# EAGLE board MySens-GWeasySensRS485-003 (EAGLE 7.6.0)
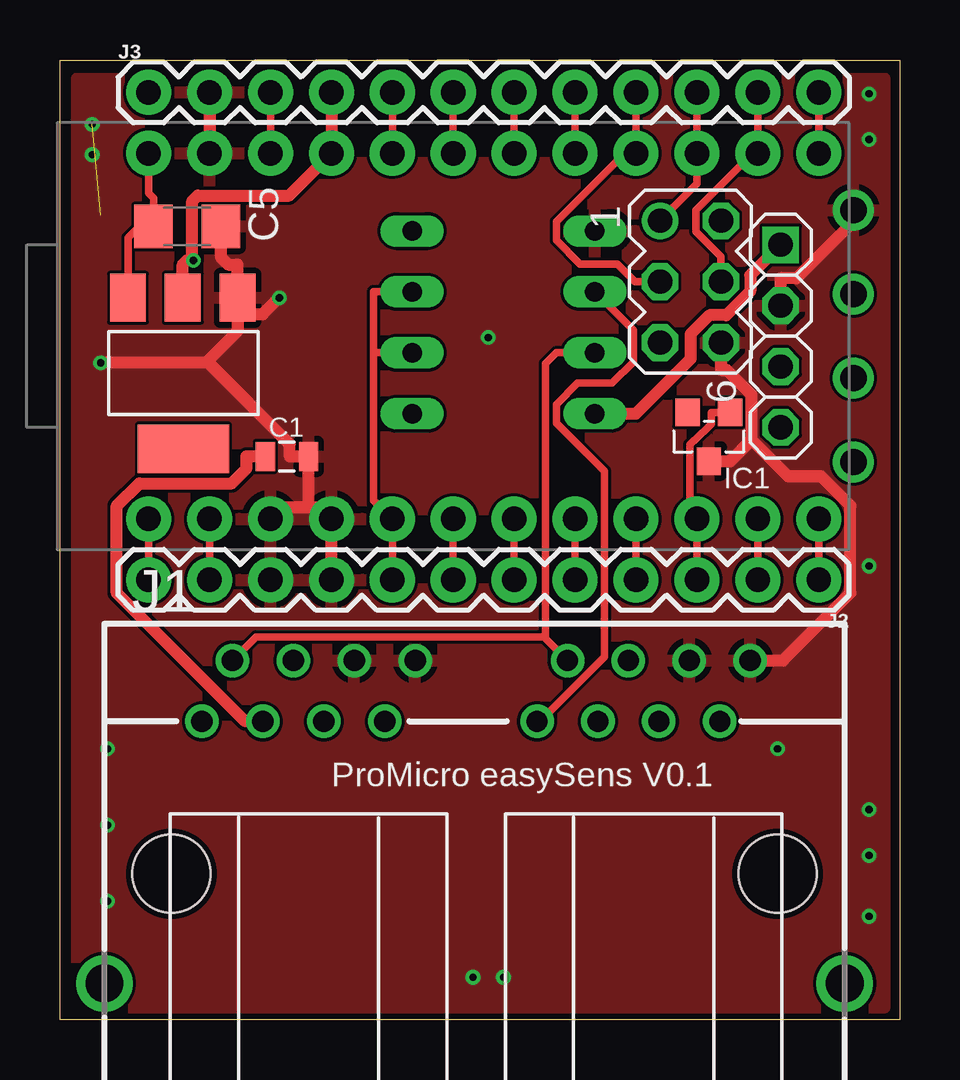
[diagram p0: board, top side]
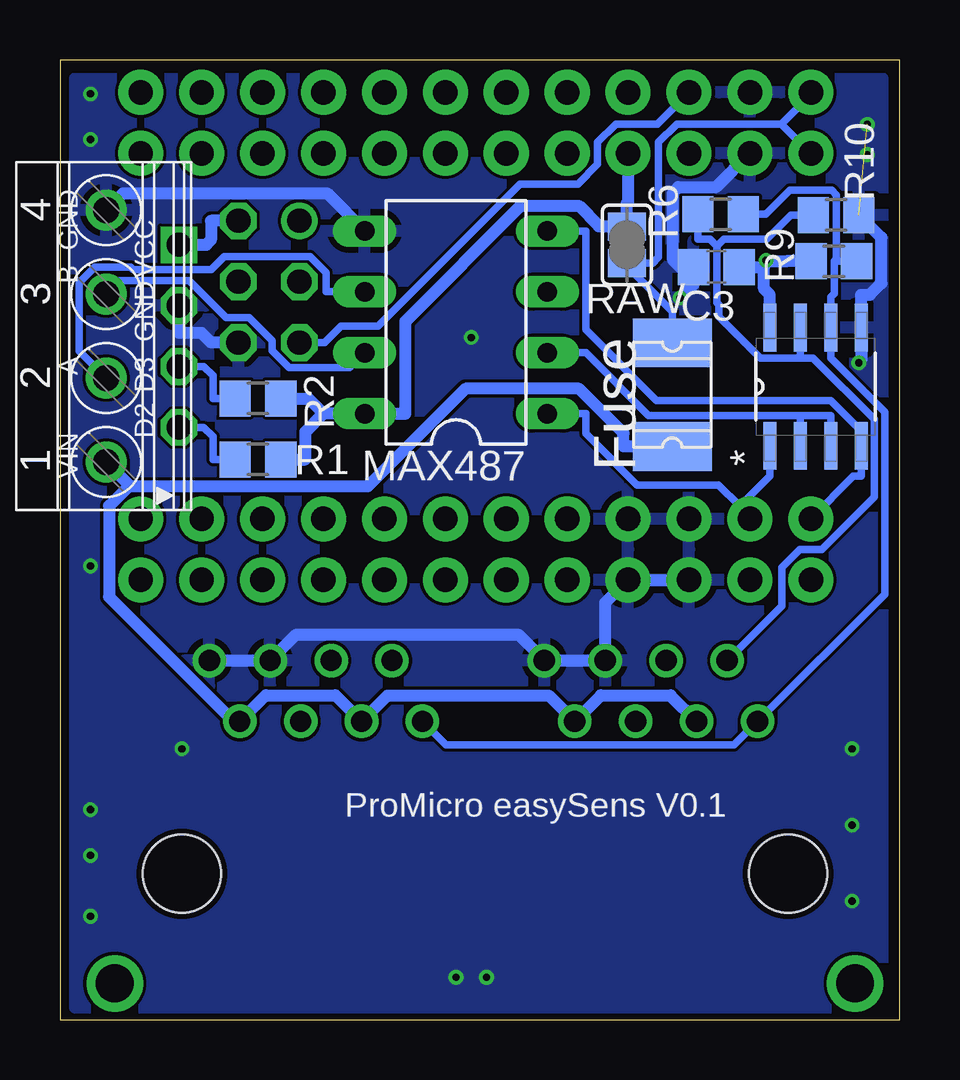
[diagram p1: board, bottom side, seen from below]

Size 35 x 40 mm. Coordinates in mm from the lower left corner, seen from the top.
Outline: 0,0 0,40 35,40 35,0 0,0
Copper layers (1*16): Top 0.035mm / dielectric 1.5mm / Bottom 0.035mm
Design rules "dirt_cheap_dirty_boards.v1": minimum track width 5mil, minimum drill 12mil, track to track 5mil, track to pad 5mil, pad to pad 5mil, via to via 5mil, smd to smd 0mil, copper to edge 10mil, drill to drill 10mil, minimum pad ring 10mil, minimum via ring 6mil, stop-mask expansion 2mil, vias tented up to drill 25mil, thermal gap 10mil
Net classes: 0 default: width 0.305 mm; 1 Power: width 0.508 mm

## Footprints (pad centres in the part's own frame; a part is rotated, then mirrored left to right if it is on the bottom)
SOT223 = smd 1.499 x 2.007: 1 -2.261,-3.15; 2 0.025,-3.15; 3 2.311,-3.15 | smd 3.81 x 2.007: 4 0,3.15
SPARKFUN_PRO_MICRO = drill 1.016 pad 1.88: 1 -7.62,12.7; 2 -7.62,10.16; 3 -7.62,7.62; 4 -7.62,5.08; 5 -7.62,2.54; 6 -7.62,0; 7 -7.62,-2.54; 8 -7.62,-5.08; 9 -7.62,-7.62; 10 -7.62,-10.16; 11 -7.62,-12.7; 12 -7.62,-15.24; 13 7.62,-15.24; 14 7.62,-12.7; 15 7.62,-10.16; 16 7.62,-7.62; 17 7.62,-5.08; 18 7.62,-2.54; 19 7.62,0; 20 7.62,2.54; 21 7.62,5.08; 22 7.62,7.62; 23 7.62,10.16; 24 7.62,12.7
0805 = smd 0.8 x 1.2: 1 -0.9,0; 2 0.9,0
C0805 = smd 1.3 x 1.5: 1 -0.95,0; 2 0.95,0
C1206 = smd 1.6 x 1.8: 1 -1.4,0; 2 1.4,0
1812L = smd 2.03 x 3.3: P$1 -2.16,0; P$2 2.16,0
SOT23 = smd 1.016 x 1.143: 1 -0.889,-1.016; 2 0.889,-1.016; 3 0,1.016
557570-1 = drill 0.889: 1-1 -11.43,6.35; 1-2 -10.16,8.89; 1-3 -8.89,6.35; 1-4 -7.62,8.89; 1-5 -6.35,6.35; 1-6 -5.08,8.89; 1-7 -3.81,6.35; 1-8 -2.54,8.89; 2-1 2.54,6.35; 2-2 3.81,8.89; 2-3 5.08,6.35; 2-4 6.35,8.89; 2-5 7.62,6.35; 2-6 8.89,8.89; 2-7 10.16,6.35; 2-8 11.43,8.89 | drill 1.575 pad 2.184: G1 -15.494,-4.572; G3 15.367,-4.572 | hole 3.251: -12.7,0; 12.573,0
1X12 = drill 1.016 pad 1.88: 1 0,0; 2 2.54,0; 3 5.08,0; 4 7.62,0; 5 10.16,0; 6 12.7,0; 7 15.24,0; 8 17.78,0; 9 20.32,0; 10 22.86,0; 11 25.4,0; 12 27.94,0
1X04-S = drill 1.016 square: 1 -3.81,0 | drill 1.016 octagon: 2 -1.27,0; 3 1.27,0; 4 3.81,0
DIL08 = drill 0.813 long: 1 -3.81,-3.81; 2 -1.27,-3.81; 3 1.27,-3.81; 4 3.81,-3.81; 5 3.81,3.81; 6 1.27,3.81; 7 -1.27,3.81; 8 -3.81,3.81
R0805 = smd 1.3 x 1.5: 1 -0.95,0; 2 0.95,0
SJ = smd 1.168 x 1.6: 1 -0.762,0; 2 0.762,0
SOIC127P600X175-8N = smd 1.981 x 0.533: 1 -2.464,1.905; 2 -2.464,0.635; 3 -2.464,-0.635; 4 -2.464,-1.905; 5 2.464,-1.905; 6 2.464,-0.635; 7 2.464,0.635; 8 2.464,1.905
MA03-2 = drill 1.016: 1 -2.54,-1.27 | drill 1.016 octagon: 2 -2.54,1.27; 3 0,-1.27; 4 0,1.27; 5 2.54,-1.27; 6 2.54,1.27
1751264 = drill 1.1 pad 1.7: 1 -5.25,-0.1; 2 -1.75,-0.1; 3 1.75,-0.1; 4 5.25,-0.1

## Placement (x,y rotation side)
1117  REG1117  [SOT223]  5.14,26.94 180 top
B1  SPARKFUN_PRO_MICRO  [SPARKFUN_PRO_MICRO]  16.39,28.49 90 top
C1  10uF  [0805]  9.46,23.48 0 top
C3  22p  [C0805]  7.63,31.37 0 bottom
C5  0.1uF  [C1206]  5.3,33.06 0 top
F1  1812L  [1812L]  9.47,26.05 90 bottom
IC1  ATSHA204A  [SOT23]  27.05,24.3 180 top
J1  [557570-1]  17.35,6.08 0 top
J2  [1X12]  31.64,18.33 180 top
J3  [1X12]  3.69,38.65 0 top
JP10  [1X04-S]  30.05,28.49 270 top
MAX487  MAX481CPA  [DIL08]  18.49,29.07 90 bottom
R1  10K  [R0805]  26.75,23.35 180 bottom
R2  10K  [R0805]  26.75,25.89 180 bottom
R6  150R  [R0805]  7.46,33.57 180 bottom
R9  330R  [R0805]  2.74,31.61 0 bottom
R10  330R  [R0805]  2.65,33.54 0 bottom
RAW  [SJ]  11.37,32.3 270 bottom
RS1  MAX487ECSA+  [SOIC127P600X175-8N]  3.5,26.38 90 bottom
SV1  [MA03-2]  26.29,30.76 270 top
X7  1751264  [1751264]  33.17,28.49 90 bottom

## Library data of the parts
1117 = burr-brown; MPN: REG1117; OC_FARNELL: 1097566; OC_NEWARK: 14P6981
B1 = SparkFun-Boards
C1 = SparkFun-Passives
C3 C5 R1 R2 R6 R9 R10 = rcl
F1 = ptc-littlefuse
IC1 = Sensor
J1 = con-amp
J2 J3 = SparkFun-Connectors
JP10 = pinhead-2
MAX487 = maxim-4
RAW = jumper
RS1 = Maxim_By_element14_Batch_1; MPN: MAX487ECSA+; OC_FARNELL: 9724532; OC_NEWARK: 68K4803; PACKAGE: SOIC-8; SUPPLIER: Maxim
SV1 = con-lstb; OC_FARNELL: unknown; OC_NEWARK: unknown
X7 = con-phoenix-350; MPN: 1751264; OC_FARNELL: unknown; OC_NEWARK: 10R0934

## Nets
3: B1.6 J2.7
3V3: IC1.2
4: B1.7 J2.6
5: B1.8 J2.5
6: B1.9 J2.4
7: B1.10 IC1.1 J2.3
8: B1.11 J2.2
9: B1.12 J2.1
10: B1.13 J3.12
A: J1.1-1 J1.2-1 MAX487.6 R6.1 R9.2 RS1.6 X7.2
A0: B1.17 J3.8
A1: B1.18 J3.7
A2: B1.19 J3.6
A3: B1.20 J3.5
B: J1.1-2 J1.2-2 MAX487.7 R6.2 R10.1 RS1.7 X7.3
D2: JP10.4 R1.2
D3: JP10.3 R2.2
GND [Power]: 1117.1 B1.3 B1.4 B1.23 C1.2 C3.1 C5.2 IC1.3 J1.1-6 J1.1-8 J1.2-6 J1.2-8 J2.9 J2.10 J3.2 JP10.2 MAX487.5 R10.2 RS1.5 SV1.6 X7.4
IN [Power]: C1.1 F1.P$1 J1.1-3 J1.1-7 J1.2-3 J1.2-7 X7.1
IRQ: B1.5 J2.8 MAX487.2 MAX487.3 RS1.2 RS1.3
MISO: B1.15 J3.10 SV1.1
MOSI: B1.14 J3.11 SV1.4
N$1: J1.2-4
N$5: J1.2-5
N$9: J1.1-4
N$10: J1.1-5
RAW: 1117.3 B1.24 C5.1 F1.P$2 J3.1 RAW.2
RST: B1.22 J3.3 SV1.5
RX: B1.2 J2.11 MAX487.1 RS1.1
SCK: B1.16 J3.9 SV1.3
TX: B1.1 J2.12 MAX487.4 RS1.4
VCC [Power]: 1117.2 B1.21 C3.2 J3.4 JP10.1 MAX487.8 R1.1 R2.1 R9.1 RAW.1 RS1.8 SV1.2

## Tracks (layer width: path | path; a pad name or v marks a point on that pad's centre or on a via)
3
  Top 0.305: J2.7 B1.6
4
  Top 0.305: J2.6 B1.7
5
  Top 0.305: J2.5 B1.8
6
  Top 0.305: J2.4 B1.9
7
  Top 0.305: J2.3 B1.10 26.26,21.17 26.26,23.96 26.43,24.13 26.46,24.13 27.15,24.82 27.15,25.31 IC1.1
8
  Top 0.305: J2.2 B1.11
9
  Top 0.305: J2.1 B1.12
10
  Top 0.305: J3.12 B1.13
A
  Top 0.305: MAX487.6 23.91,28.73 23.91,27.41 23.02,26.52 21.58,26.52 20.7,25.64 20.7,24.87 22.69,22.87 22.69,15.12 20,12.43 J1.2-1
  Bottom 0.305: MAX487.6 23.9,30.34 23.9,31.13 24.58,31.8 28.16,31.8 28.71,31.26 31.94,31.26 32.05,31.37 33.55,31.37 34.21,30.71 34.21,27.87 X7.2 | J1.2-1 18.91,11.45 6.9,11.45 J1.1-1 0.62,17.73 0.62,25.32 2.87,27.57 2.87,28.32 RS1.6 2.87,30.11 2.72,30.26 2.72,31.61 2.63,31.61 | R6.1 5.58,33.57 4.58,34.57 2.83,34.57 2.63,34.37 2.63,31.61 | 2.63,31.61 2.57,31.61 R9.2
A0
  Top 0.305: J3.8 B1.17
A1
  Top 0.305: J3.7 B1.18
A2
  Top 0.305: J3.6 B1.19
A3
  Top 0.305: J3.5 B1.20
B
  Top 0.305: 20.25,15.95 20.25,15.88 J1.2-2 | 20.25,15.95 20.25,27.34 20.7,27.8 MAX487.7 | J1.1-2 8.17,15.95 20.25,15.95
  Bottom 0.305: 7.61,32.24 7.91,32.54 8.41,32.54 R6.2 | 4.14,27.57 5.8,27.57 7.54,29.31 7.54,29.8 7.61,29.88 7.61,32.24 | 7.61,32.24 7.32,32.54 5.53,32.54 4.53,33.54 R10.1 | 4.14,27.57 4.14,27.68 RS1.7 | J1.1-2 4.91,17.24 4.91,18.84 4.16,19.6 3.24,19.6 1.05,21.79 1.05,25.02 3.6,27.57 4.14,27.57 | X7.3 32.51,30.8 29.61,30.8 28.07,29.26 27.12,29.26 26.16,28.3 26.16,27.88 25.45,27.17 22.92,27.17 MAX487.7
D2
  Bottom 0.305: R1.2 28.62,23.35 28.62,24.3 29,24.68 JP10.4
D3
  Bottom 0.305: R2.2 28.62,25.89 28.62,26.84 29,27.22 JP10.3
GND  (via drill 0.3 pad 0.61)  (1 unrouted)
  Top 0.508: 10.36,21.35 9.25,21.35 B1.3 | 10.36,21.35 10.84,21.35 B1.4 J2.9 | 10.36,21.35 C1.2 9.58,23.48 9.58,24 6.2,27.38 | 6.2,27.38 v1.7,27.38 | 6.2,27.38 6.2,27.5 7.41,28.7 7.41,29.4 | 7.41,29.4 8.45,29.4 v9.14,30.09 | 7.41,29.4 1117.1 7.41,31.47 7.01,31.47 6.7,31.78 C5.2 | 28.83,24.17 27.94,23.28 IC1.3 | 28.83,24.17 28.83,26.04 27.8,27.08 27.55,27.08 SV1.6 | J1.2-8 30.14,14.97 32.96,17.78 32.96,21.42 31.74,22.64 30.36,22.64 28.83,24.17 | J3.2 B1.23 | JP10.2 30.05,30.9 30.72,30.9 33.08,33.26 X7.4
  Bottom 0.508: v9.14,30.09 8.59,30.64 8.59,30.8 | v1.7,27.38 1.6,27.47 RS1.5 1.6,30.21 1.24,30.21 0.76,30.69 0.76,32.6 R10.2 | X7.4 32.37,34.45 23.87,34.45 MAX487.5 | 8.59,30.8 9.44,31.66 9.44,34.48 9.22,34.7 7.64,34.7 B1.23 | C3.1 8.59,30.8 | J2.10 J2.9 12.27,17.38 J1.1-6 J1.1-8 15.89,16.05 25.16,16.05 J1.2-6 J1.2-8 | JP10.2 30.05,28.62 29.09,28.62 28.7,28.22 SV1.6
  other vias: 1.34,37.32 1.34,36.05 33.73,38.59 33.73,36.69 33.73,18.91 33.73,4.3 33.73,6.84 33.73,8.74 18.49,1.76 17.22,1.76 1.98,4.93 1.98,8.11 1.98,11.29 17.86,28.43 29.92,11.29
  pour Top: 0.71,39.23 34.37,39.23 34.37,0.49 0.71,0.49
  pour Bottom: 0.71,39.23 0.71,0.49 34.37,0.49 34.37,39.23
IN
  Top 0.508: C1.1 7.78,23.48 7.78,22.98 7.16,22.35 3.31,22.35 2.37,21.42 2.37,17.78 7.72,12.43 J1.1-3
  Bottom 0.508: 32.1,22.27 32.96,21.42 32.96,17.62 27.77,12.43 J1.2-7 26.42,13.51 23.51,13.51 J1.2-3 21.35,13.51 14.62,13.51 J1.1-7 12.45,13.51 9.54,13.51 J1.1-3 | 32.1,22.27 X7.1 | 32.1,22.27 32.05,22.22 22.17,22.22 18.09,26.3 13.37,26.3 11.51,24.44 11.51,23.89 F1.P$1
IRQ
  Top 0.305: 13.08,27.8 13.08,21.64 B1.5 J2.8 | 13.08,27.8 13.19,27.8 MAX487.2 | MAX487.3 13.08,30.34 13.08,27.8
  Bottom 0.305: 4.14,25.19 10.47,25.19 13.08,27.8 MAX487.2 | 4.14,25.19 2.87,25.19 RS1.3 | 4.14,25.19 4.14,25.09 RS1.2
MISO
  Top 0.305: J3.10 B1.15 26.55,34.84 SV1.1
MOSI
  Top 0.305: SV1.4 27.55,31.8 26.51,32.84 26.51,33.74 28.88,36.11 B1.14 J3.11
RAW
  Top 0.305: 3.9,33.66 2.83,32.59 1117.3 | 3.9,33.66 3.9,34.24 3.69,34.45 B1.24 | C5.1 3.9,33.66
  Bottom 0.305: F1.P$2 9.47,29.5 11.08,31.11 11.08,31.53 | 11.08,31.53 10.29,31.53 10.04,31.77 10.04,36.57 9.28,37.33 4.92,37.33 | RAW.2 11.08,31.53 | B1.24 4.92,37.33 | 4.92,37.33 3.69,38.55 J3.1
RST
  Top 0.305: J3.3 B1.22
  Bottom 0.305: SV1.5 23.97,28.22 23.28,28.91 21.73,28.91 15.82,34.82 13.41,34.82 12.59,35.65 12.59,36.57 11.82,37.33 10.09,37.33 J3.3
RX
  Top 0.305: J2.11 B1.2
  Bottom 0.305: 6.66,21.4 6.24,20.98 B1.2 | 6.66,21.4 7.55,22.29 10.94,22.29 13.08,24.43 13.08,25.25 MAX487.1 | 6.66,21.4 5.41,22.65 RS1.1
SCK
  Top 0.305: SV1.3 23.97,30.76 23.24,31.5 21.69,31.5 20.7,32.48 20.7,33.27 23.54,36.11 B1.16 J3.9
TX
  Top 0.305: J2.12 B1.1
  Bottom 0.305: MAX487.4 13.08,32.88 13.08,28.75 10.13,25.8 2.86,25.8 1.6,24.54 RS1.4 1.6,22.65 1.92,22.65 B1.1
VCC  (via drill 0.3 pad 0.61)
  Top 0.508: 5.52,31.65 5.52,34.12 5.74,34.35 9.55,34.35 B1.21 J3.4 | 5.52,31.65 v5.56,31.65 | 5.52,31.65 5.29,31.65 5.12,31.47 1117.2 | MAX487.8 24,25.25 26.29,27.54 26.29,28.57 27.08,29.36 27.77,29.36 28.77,30.36 28.77,31.03 JP10.1
  Bottom 0.508: B1.21 11.31,34.07 11.37,34.02 RAW.1 12.55,33.06 12.55,33.1 13.37,33.92 15.77,33.92 20.6,29.09 20.6,25.25 MAX487.8 22.73,25.25 24,25.25 | 5.56,31.61 5.65,31.52 5.65,31.37 | v5.56,31.65 5.56,31.61 | 5.56,31.61 4.72,31.61 R9.1 | R1.1 24.76,23.35 24.76,24.49 24,25.25 | R2.1 24.64,25.89 24,25.25 | C3.2 5.65,31.37 | RS1.8 5.41,30.21 5.65,30.46 5.65,31.37 | SV1.2 28.7,33.3 28.7,32.5 28.9,32.3 JP10.1

## Text on the board
tNames: ProMicro easySens V0.1
bNames: GND | VCC | GND | B | Fuse | D3 | A | D2 | VIN | ProMicro easySens V0.1